# EAGLE board BFO (EAGLE 5.07)
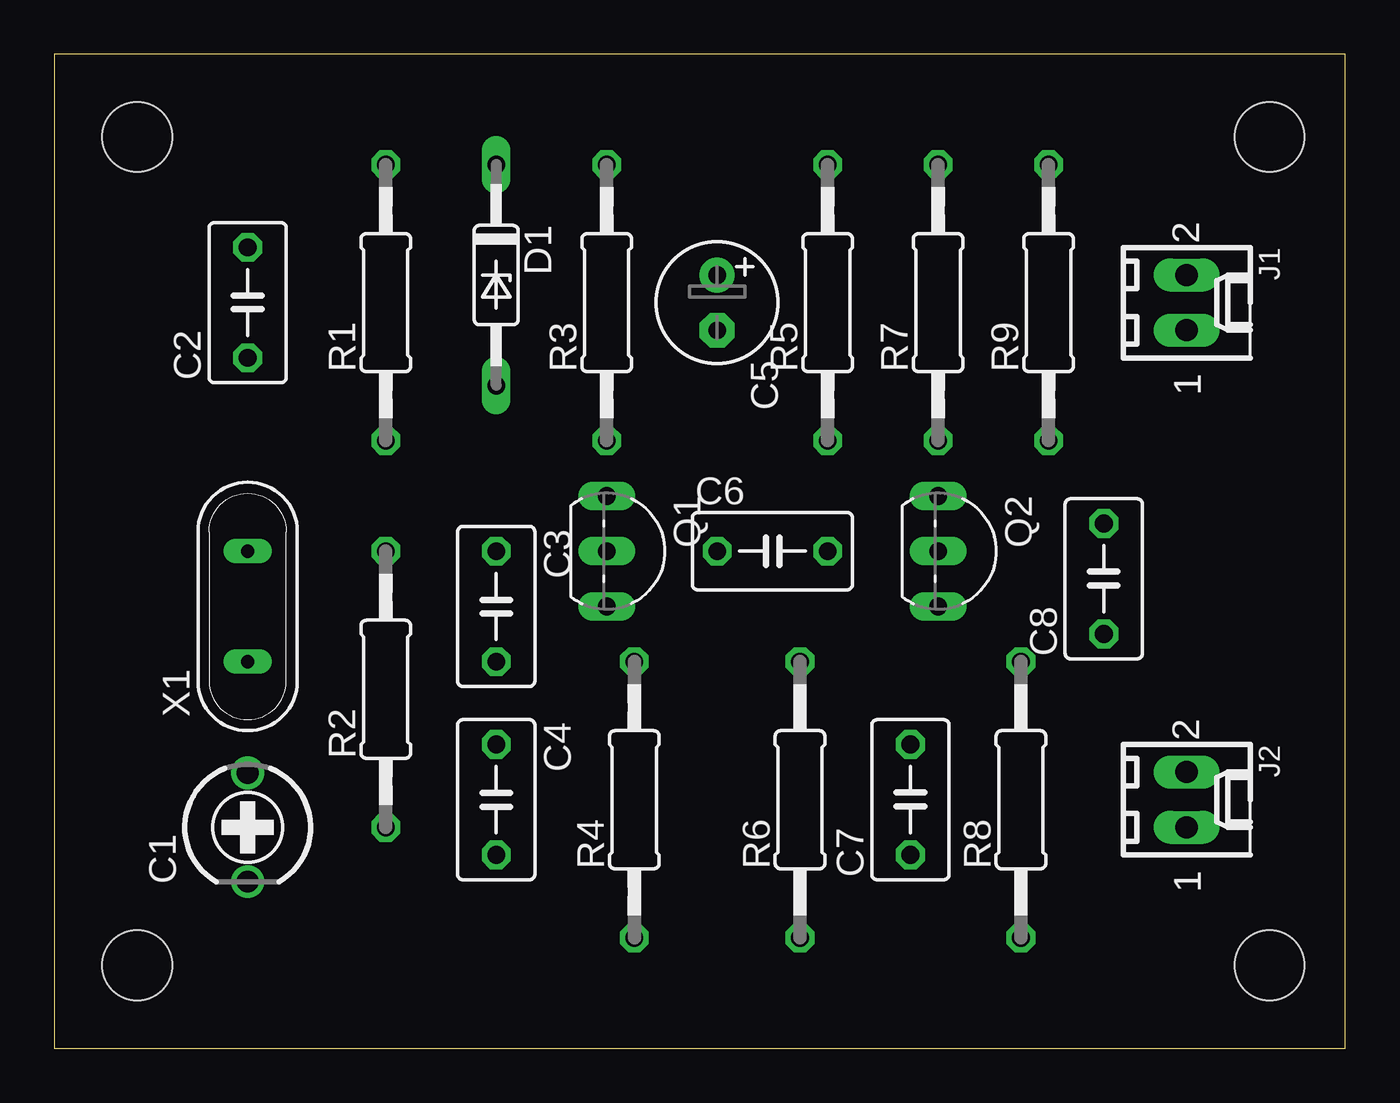
[diagram p0: board, top side]
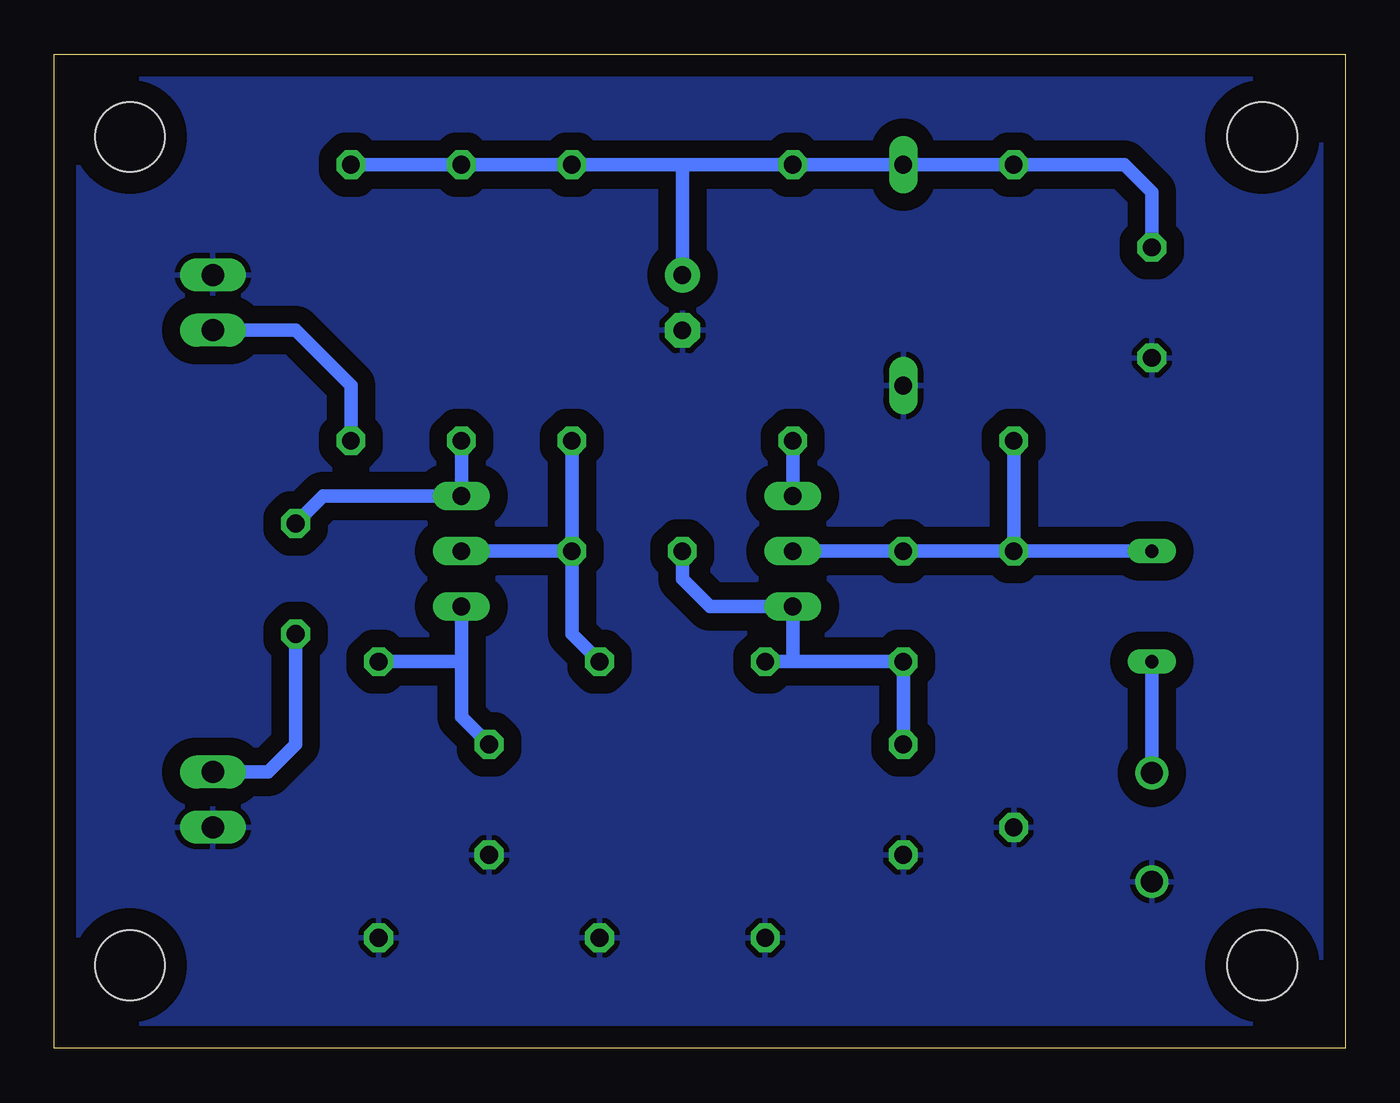
[diagram p1: board, bottom side, seen from below]

Size 59.36 x 45.71 mm. Coordinates in mm from the lower left corner, seen from the top.
Outline: 0,0 59.36,0 59.36,45.71 0,45.71 0,0
Copper layers (1*16): Top 0.035mm / dielectric 1.5mm / Bottom 0.035mm
Design rules "default": minimum track width 10mil, minimum drill 24mil, track to track 8mil, track to pad 8mil, pad to pad 8mil, via to via 8mil, smd to smd 8mil, copper to edge 40mil, drill to drill 8mil, minimum pad ring 10mil, minimum via ring 8mil, stop-mask expansion 4mil, vias tented up to drill 0mil, thermal gap 10mil
Holes 3.2 mm at 3.81,41.91 3.81,3.81 55.88,3.81 55.88,41.91

## Footprints (pad centres in the part's own frame; a part is rotated, then mirrored left to right if it is on the bottom)
CTRIMTZ03 = drill 1 round: 1 0,2.5; 2 0,-2.5
C050-035X075 = drill 0.813 octagon: 1 -2.54,0; 2 2.54,0
E2,5-6 = drill 0.813 pad 1.6 round: + -1.27,0 | drill 0.813 pad 1.6 octagon: - 1.27,0
DO35Z10 = drill 0.813 long: A 5.08,0; C -5.08,0
6410-02 = drill 1.016 long: 1 1.27,0; 2 -1.27,0
TO92-EBC = drill 0.813 long: B 0,-1.27; C -2.54,-1.27; E 2.54,-1.27
0207/12 = drill 0.813 octagon: 1 -6.35,0; 2 6.35,0
QS = drill 0.61 long: 1 -2.54,0; 2 2.54,0

## Placement (x,y rotation side)
C1  22pF  [CTRIMTZ03]  8.89,10.16 0 top
C2  0.01uF  [C050-035X075]  8.89,34.29 90 top
C3  100pF  [C050-035X075]  20.32,20.32 270 top
C4  100pF  [C050-035X075]  20.32,11.43 270 top
C5  10uF35V  [E2,5-6]  30.48,34.29 270 top
C6  22pF  [C050-035X075]  33.02,22.86 0 top
C7  0.01uF  [C050-035X075]  39.37,11.43 90 top
C8  100pF  [C050-035X075]  48.26,21.59 90 top
D1  Z6V  [DO35Z10]  20.32,35.56 270 top
J1  +12V  [6410-02]  52.07,34.29 270 top
J2  OUT  [6410-02]  52.07,11.43 270 top
Q1  BC548B  [TO92-EBC]  26.67,22.86 270 top
Q2  BC548B  [TO92-EBC]  41.91,22.86 270 top
R1  22k  [0207/12]  15.24,34.29 90 top
R2  22k  [0207/12]  15.24,16.51 90 top
R3  22E  [0207/12]  25.4,34.29 90 top
R4  1k  [0207/12]  26.67,11.43 90 top
R5  22k  [0207/12]  35.56,34.29 90 top
R6  5k6  [0207/12]  34.29,11.43 90 top
R7  1k  [0207/12]  40.64,34.29 90 top
R8  220E  [0207/12]  44.45,11.43 90 top
R9  1k  [0207/12]  45.72,34.29 90 top
X1  4.43MHz  [QS]  8.89,20.32 90 top

## Library data of the parts
C1-C8 R1-R9 = rcl
D1 = diode
J1 J2 = con-molex
Q1 Q2 = transistor-npn
X1 = special

## Nets
GND: C1.2 C2.1 C4.2 C5.- C7.1 D1.A J1.2 J2.1 R2.1 R4.1 R6.1 R8.1
N$1: C7.2 Q2.E R8.2
N$2: C3.1 Q1.B R1.1 R2.2 X1.2
N$3: C3.2 C4.1 C6.1 Q1.E R4.2
N$4: C1.1 X1.1
N$5: C6.2 Q2.B R5.1 R6.2
N$6: C8.1 J2.2
N$7: Q1.C R3.1
N$8: C8.2 Q2.C R7.1
N$9: C2.2 C5.+ D1.C R1.2 R3.2 R5.2 R7.2 R9.2
N$10: J1.1 R9.1

## Tracks (layer width: path | path; a pad name or v marks a point on that pad's centre or on a via)
GND
  pour Bottom (isolate 0.813): 0.25,45.47 58.93,45.47 58.93,0.25 0.25,0.25
N$1
  Bottom 0.61: 40.64,17.78 Q2.E | 40.64,17.78 40.64,15.24 C7.2 | 40.64,17.78 R8.2
N$2
  Bottom 0.61: R2.2 R1.1 | X1.2 R2.2 | R2.2 C3.1 Q1.B
N$3
  Bottom 0.61: C6.1 30.48,21.59 29.21,20.32 Q1.E 25.4,17.78 R4.2 C3.2 C4.1
N$4
  Bottom 0.61: X1.1 8.89,13.46 C1.1
N$5
  Bottom 0.61: C6.2 Q2.B | C6.2 35.56,19.05 R6.2 | C6.2 R5.1
N$6
  Bottom 0.61: C8.1 48.26,13.97 49.53,12.7 J2.2
N$7
  Bottom 0.61: R3.1 25.4,26.67 Q1.C
N$8
  Bottom 0.61: R7.1 40.64,26.67 Q2.C 46.99,25.4 C8.2
N$9
  Bottom 0.61: R9.2 R7.2 R5.2 30.48,40.64 | C2.2 8.89,39.37 10.16,40.64 R1.2 D1.C R3.2 30.48,40.64 | 30.48,40.64 C5.+
N$10
  Bottom 0.61: J1.1 48.26,33.02 45.72,30.48 R9.1